# EAGLE board Schablone (EAGLE 5.09)

No outline drawn. Coordinates in mm, seen from the top.
Copper layers (1*16): Top 0.035mm / dielectric 1.5mm / Bottom 0.035mm
Design rules "default": minimum track width 10mil, minimum drill 24mil, track to track 8mil, track to pad 8mil, pad to pad 8mil, via to via 8mil, smd to smd 8mil, copper to edge 40mil, drill to drill 8mil, minimum pad ring 10mil, minimum via ring 8mil, stop-mask expansion 4mil, vias tented up to drill 0mil, thermal gap 10mil

## Footprints (pad centres in the part's own frame; a part is rotated, then mirrored left to right if it is on the bottom)
5,0 = hole 5: 0,0
4,1 = hole 4.1: 0,0
3,0 = hole 3: 0,0

## Placement (x,y rotation side)
E$1  [5,0]  -66.67,66.67 0 top
E$2  [5,0]  -47.62,66.67 0 top
E$3  [5,0]  -28.57,66.67 0 top
E$4  [5,0]  -9.53,66.67 0 top
E$5  [5,0]  9.53,66.67 0 top
E$6  [5,0]  28.57,66.67 0 top
E$7  [5,0]  47.62,66.67 0 top
E$8  [5,0]  66.67,66.67 0 top
E$9  [5,0]  -66.67,47.62 0 top
E$10  [5,0]  -47.62,47.62 0 top
E$11  [5,0]  -28.57,47.62 0 top
E$12  [5,0]  -9.53,47.62 0 top
E$13  [5,0]  9.53,47.62 0 top
E$14  [5,0]  28.57,47.62 0 top
E$15  [5,0]  47.62,47.62 0 top
E$16  [5,0]  66.67,47.62 0 top
E$17  [5,0]  -66.67,28.57 0 top
E$18  [5,0]  -47.62,28.57 0 top
E$19  [5,0]  -28.57,28.57 0 top
E$20  [5,0]  -9.53,28.57 0 top
E$21  [5,0]  9.53,28.57 0 top
E$22  [5,0]  28.57,28.57 0 top
E$23  [5,0]  47.62,28.57 0 top
E$24  [5,0]  66.67,28.57 0 top
E$25  [5,0]  -66.67,9.53 0 top
E$26  [5,0]  -47.62,9.53 0 top
E$27  [5,0]  -28.57,9.53 0 top
E$28  [5,0]  -9.53,9.53 0 top
E$29  [5,0]  9.53,9.53 0 top
E$30  [5,0]  28.57,9.53 0 top
E$31  [5,0]  47.62,9.53 0 top
E$32  [5,0]  66.67,9.53 0 top
E$33  [5,0]  -66.67,-9.53 0 top
E$34  [5,0]  -47.62,-9.53 0 top
E$35  [5,0]  -28.57,-9.53 0 top
E$36  [5,0]  -9.53,-9.53 0 top
E$37  [5,0]  9.53,-9.53 0 top
E$38  [5,0]  28.57,-9.53 0 top
E$39  [5,0]  47.62,-9.53 0 top
E$40  [5,0]  66.67,-9.53 0 top
E$41  [5,0]  -66.67,-28.57 0 top
E$42  [5,0]  -47.62,-28.57 0 top
E$43  [5,0]  -28.57,-28.57 0 top
E$44  [5,0]  -9.53,-28.57 0 top
E$45  [5,0]  9.53,-28.57 0 top
E$46  [5,0]  28.57,-28.57 0 top
E$47  [5,0]  47.62,-28.57 0 top
E$48  [5,0]  66.67,-28.57 0 top
E$49  [5,0]  -66.67,-47.62 0 top
E$50  [5,0]  -47.62,-47.62 0 top
E$51  [5,0]  -28.57,-47.62 0 top
E$52  [5,0]  -9.53,-47.62 0 top
E$53  [5,0]  9.53,-47.62 0 top
E$54  [5,0]  28.57,-47.62 0 top
E$55  [5,0]  47.62,-47.62 0 top
E$56  [5,0]  66.67,-47.62 0 top
E$57  [5,0]  -66.67,-66.67 0 top
E$58  [5,0]  -47.62,-66.67 0 top
E$59  [5,0]  -28.57,-66.67 0 top
E$60  [5,0]  -9.53,-66.67 0 top
E$61  [5,0]  9.53,-66.67 0 top
E$62  [5,0]  28.57,-66.67 0 top
E$63  [5,0]  47.62,-66.67 0 top
E$64  [5,0]  66.67,-66.67 0 top
E$65  [4,1]  -78.74,78.74 0 top
E$66  [4,1]  78.74,78.74 0 top
E$67  [4,1]  78.74,-78.74 0 top
E$68  [4,1]  -78.74,-78.74 0 top
E$69  [3,0]  -57.15,38.73 0 top
E$70  [3,0]  -57.15,19.05 0 top
E$71  [3,0]  -57.15,-37.47 0 top
E$72  [3,0]  -57.15,-18.41 0 top
E$73  [3,0]  57.78,-19.05 0 top
E$74  [3,0]  57.78,-38.1 0 top
E$75  [3,0]  57.15,38.73 0 top
E$76  [3,0]  57.15,19.68 0 top

## Library data of the parts
E$1-E$76 = holes

## Text on the board
Top: Spalte 0 | Spalte 1 | Spalte 2 | Spalte 3 | Spalte 4 | Spalte 5 | Spalte 6 | Spalte 7 | 1 | 9 | 17 | 25 | 33 | 41 | 49 | 57 | 2 | 3 | 4 | 5 | 6 | 7 | 8 | 16 | 24 | 32 | 40 | 48 | 56 | 64